# Altium PCB WCE_NanEyeC_board.PcbDoc
Units mm, origin at the board's own origin, x right, y up, seen from the top; angles counter-clockwise.
Board outline 20 x 10 mm, 2 copper layers (Top Layer, Bottom Layer); 10 components, 4 nets, 22 pads, 0 vias.
Unrouted connection lines stored in the file: 2.
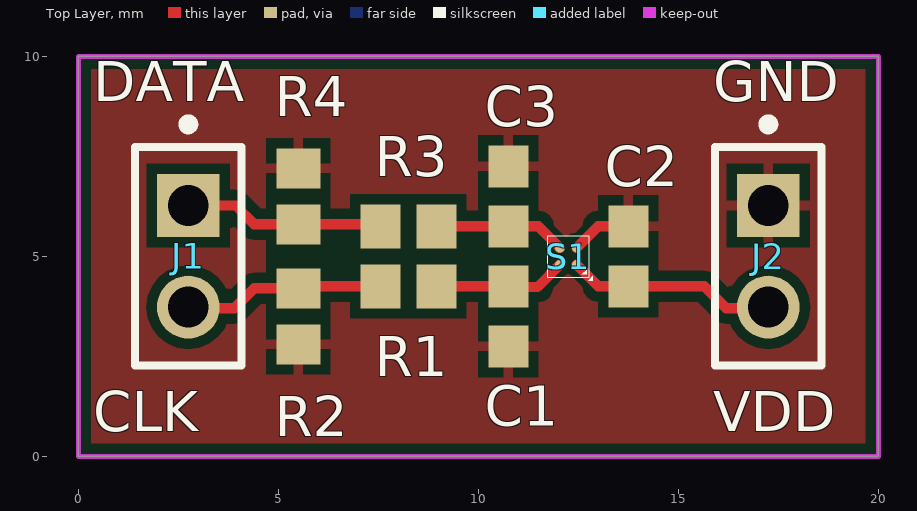
[diagram p0: Top Layer view]
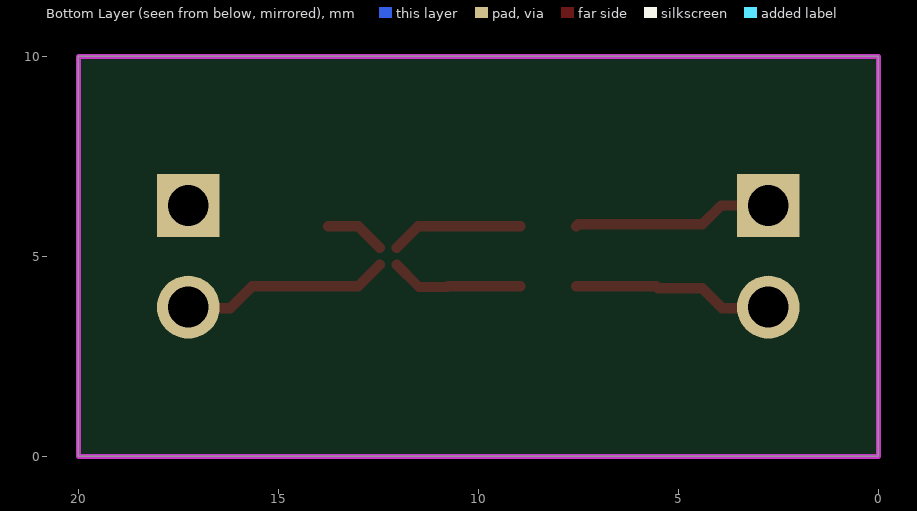
[diagram p1: Bottom Layer view, seen from below]

## Layer stack, top to bottom
Top Solder: solder mask 0.0102, Solder Resist, Dk 3.5
Top Layer: signal copper 0.0356
Dielectric 1: dielectric 0.32, FR-4, Dk 4.8
Bottom Layer: signal copper 0.0356
Bottom Solder: solder mask 0.0102, Solder Resist, Dk 3.5

## Board outline
0,0 0,10 20,10 20,0

## Design rules (kind name [scope] priority, off if disabled: settings)
Clearance NanEyeC_1 [WithinRoom('NanEyeC')] p1: gap=0.15 ignorepadtopadclearanceinfootprint=TRUE
Clearance [All] p2: gap=0.254 ignorepadtopadclearanceinfootprint=TRUE except(0: Arc-Hole Track-Hole SMDPad-Hole THPad-Hole Via-Hole Fill-Hole Poly-Hole Region-Hole Text-Hole)
PolygonConnect [All] p1: connectstyle=Relief reliefconductorwidth=0.254 reliefentries=4 polygonreliefangle="90 Angle" airgapwidth=0.254
RoomDefinition NanEyeC [InComponentClass('Room Definition 1')] p1: confinementstyle=ConfineIn formatcopy=TRUE lockcomponents=FALSE outline 11.471,4.141 11.471,5.779 13.119,5.779 13.119,4.141
RoutingVias [All] p1: holewidth=0.711 width=1.27 viastyle="Through Hole" minholewidth=0.711 minwidth=1.27 maxholewidth=0.711 maxwidth=1.27
SolderMaskExpansion [All] p1: expansion=0.102 istentingtop=FALSE
Width [All] p1: maxlimit=0.254 minlimit=0.254 preferedwidth=0.254
30 further rules are at their usual default settings.

## Classes and differential pairs
component class "Room Definition 1": S1

## Components (designator, comment, footprint, x,y, rotation, side; value= is the part's Value field where it differs from the comment)
C1 "15pF" CAPC1608X90X35NL15T15 10.75,3.5 r90 top
C2 "470nF" CAPC1608X90X35NL15T15 13.75,5 r270 top
C3 "15pF" CAPC1608X90X35NL15T15 10.75,6.5 r270 top
J1 "TSW-102-07-G-S" FP-TSW-102-07-G-S-MFG 2.75,5 r270 top
J2 "TSW-102-07-G-S" FP-TSW-102-07-G-S-MFG 17.25,5 r270 top
R1 "24R" RESC1608X50X30ML20T20 8.25,4.25 r0 top
R2 "10k" RESC1608X50X30ML20T20 5.5,3.5 r90 top
R3 "24R" RESC1608X50X30ML20T20 8.25,5.75 r0 top
R4 "10k" RESC1608X50X30ML20T20 5.5,6.5 r270 top
S1 "NanEyeC" NanEyeC 12.25,5 r0 top

## Footprints (in the part's own frame and the unit in brackets; to place one, negate y for a bottom-side part, rotate by r counter-clockwise, add the part's x,y. Pads: shape width x height; smd on the part's side, far side on the other; paste and mask are expansions set on the pad)
CAPC1608X90X35NL15T15 [mm] "Chip Capacitor, 2-Leads, Body 1.60x0.81mm, IPC Medium Density"
  rect 1.05x1 smd: 1(-0.75,0) 2(0.75,0)
  body extent -0.88,-0.48 0.87,0.48, height 0.9
FP-TSW-102-07-G-S-MFG [mm]
  rect 1.57x1.57 hole 1.02 paste-1000 mask+0: 1(-1.27,0)
  round 1.57 hole 1.02 paste-1000 mask+0: 2(1.27,0)
  silkscreen extent -3.42,-1.34 2.73,1.34, body extent -2.83,-1.44 2.83,1.44, height 0.25
NanEyeC [mm]
  round 0.24 smd mask+0.05: A1(0.213,-0.212) B1(-0.212,-0.212) B2(-0.212,0.213)
  round 0.24 smd paste+0 mask+0.05: A2(0.213,0.213)
  silkscreen extent -0.52,-0.6 0.61,0.52, body extent -0.52,-0.52 0.52,0.53, height 2.17
RESC1608X50X30ML20T20 [mm] "Chip Resistor, 2-Leads, Body 1.60x0.80mm, IPC Low Density"
  rect 1x1.1 smd: 1(-0.7,0) 2(0.7,0)
  body extent -0.9,-0.5 0.9,0.5, height 0.5

## Part data
C1 C2 C3: library part CMP-2006-04463-1, Manufacturer="AVX Interconnect / Elco", Part Number=06035D104KAT2A
J1 J2: library part CMP-02766-000084-1, "CONN HEADER VERT 2POS 2.54MM", Current Rating=6.3A, Manufacturer=Samtec, Temperature="-55°C to +125°C", Temperature Range High=+125°C, Temperature Range Low=-55°C, Voltage Rating=550V, Automotive=No, Category=Conn, ComponentLink2Description=Datasheet, ComponentLink2URL=http://suddendocs.samtec.com/catalog_english/tsw_th.pdf, Conn Gender=Male, Conn Orientation=Straight, Contact Material=Gold,Nickel, Device Class L1=Connectors, Device Class L2="Headers and Wire Housings", Device Class L3=unset, Digikey Description="CONN HEADER VERT 2POS 2.54MM", Footprint Url=http://suddendocs.samtec.com/prints/tsw-xxx-xx-x-x-xx-xxx-footprint.pdf, Height=8.71mm, Lead Free=Yes, Manufacturer Part Number=TSW-102-07-G-S, Mouser Description="Conn Unshrouded Header HDR 2 POS 2.54mm Solder ST Thru-Hole Automotive Bulk", Number of Contacts=2, Number of Rows=1, Octopart=https://octopart.com/tsw-102-07-g-s-samtec-272197, Package=TSW-102-07-G-S, Pitch=2.54mm, RoHS=TRUE
R1 R2 R3 R4: library part CMP-2000-02665-1, Manufacturer=Susumu, Part Number=RR0816P-4640-D-65A
S1: "Camera module NanEyeC from AMS. The Part will be delivered by us"

## Nets (pads, with @x,y where several pads share a name; then routed paths per layer and width w, separated by ;. In a path a pad name is that pad's centre, name@x,y a point inside that pad or via, vN(x,y) a via of type N, cw(c..) or ccw(c..) an arc to the next point about the centre after c; other vN are vias at no path point)
GND: C1.1 C2.1 C3.1 J2.1 R2.1 R4.1 S1.A2 | length 1.5
  Top Layer w0.254: S1.A2 13,5.75 C2.1
SPI_CLK: C1.2 J1.2 R1.1 R1.2 R2.2 S1.B1 | length 8.4
  Top Layer w0.254: J1.2 2.78,3.7 3.9,3.7 4.4,4.2 R2.2 5.55,4.25 R1.1 ; R1.2 C1.2 10.768,4.232 11.482,4.232 S1.B1
SPI_DATA: C3.2 J1.1 R3.1 R3.2 R4.2 S1.B2 | length 8.3
  Top Layer w0.254: J1.1 3.93,6.27 4.4,5.8 R4.2 7.5,5.8 R3.1 ; R3.2 C3.2 11.5,5.75 S1.B2
VDD: C2.2 J2.2 S1.A1 | length 5.3
  Top Layer w0.254: S1.A1 13,4.25 C2.2 15.65,4.25 16.2,3.7 17.22,3.7 J2.2

## Polygon pours and split planes (outlines as drawn)
GND on Top Layer "GND_L01_P000" (solid, pour order 0): 0,0 0,10 20,10 20,0

## Keep-outs
Keep-Out Layer:
  the board outline again, w0.127

## Silkscreen, mask and mechanical layers (free items; w line width, h text height)
Top Overlay:
  text "DATA" at 0.377,8.877 h1
  text "GND" at 15.877,8.877 h1
  text "CLK" at 0.377,0.627 h1
  text "VDD" at 15.877,0.627 h1